# Altium PCB Half-bridge_eval.PcbDoc
Units mm, origin at the board's own origin, x right, y up, seen from the top; angles counter-clockwise.
Board outline 85.72 x 47.24 mm, 2 copper layers (Top Layer, Bottom Layer); 14 components, 10 nets, 43 pads, 0 vias.
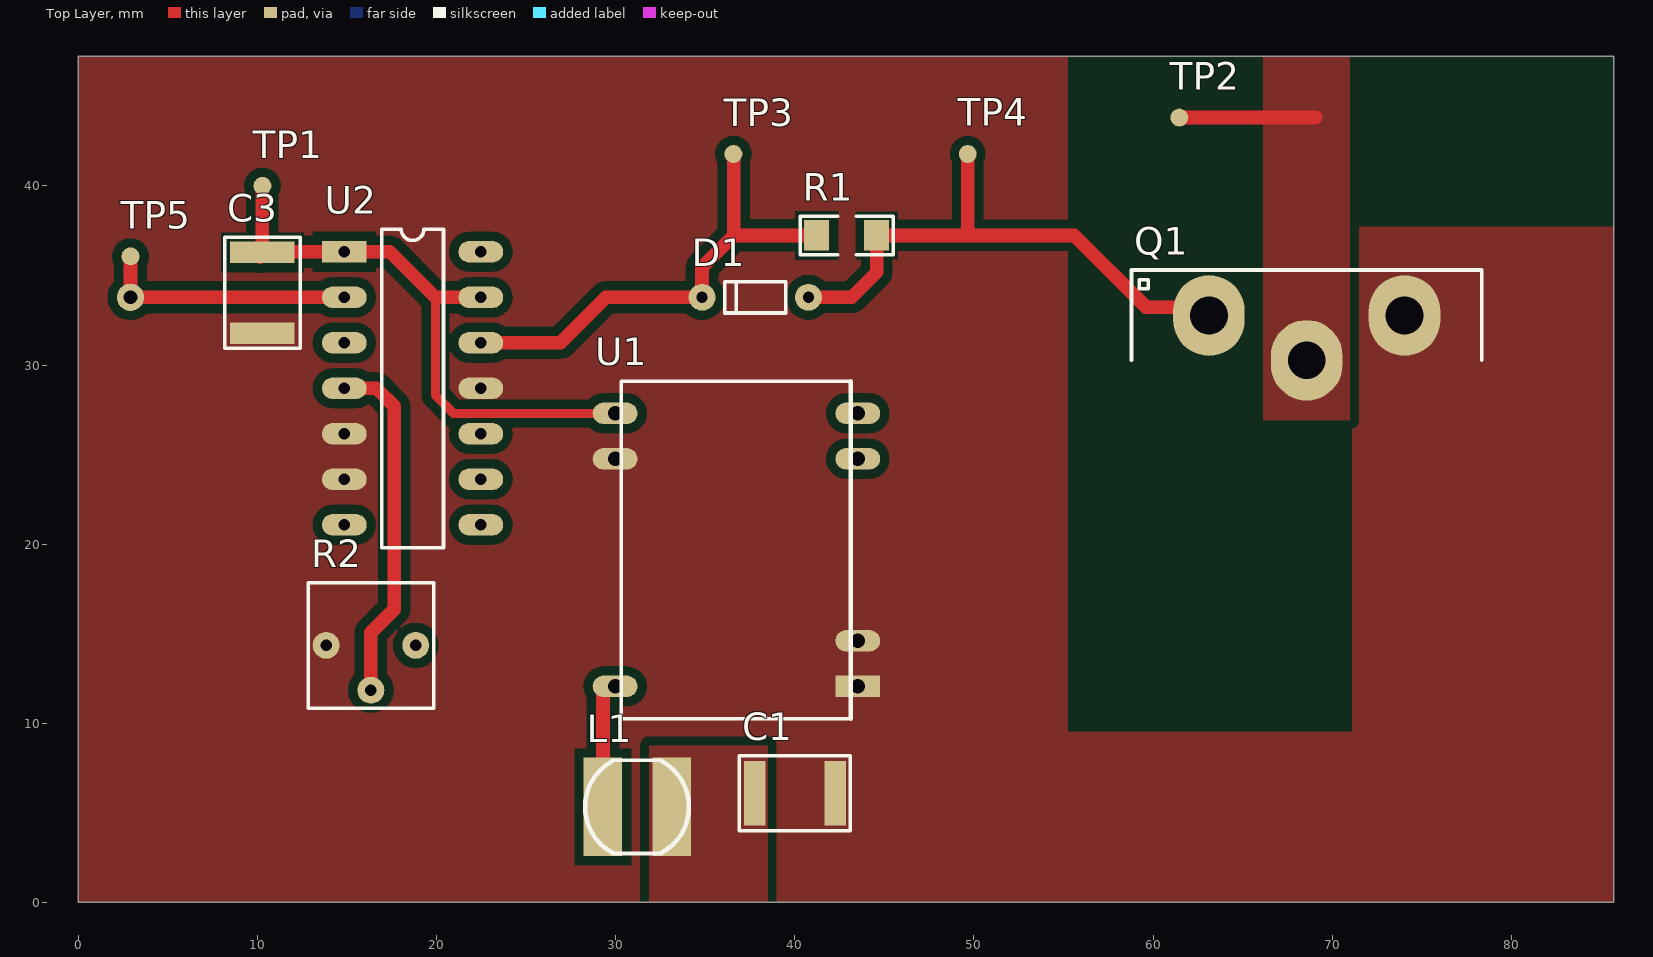
[diagram p0: Top Layer view]
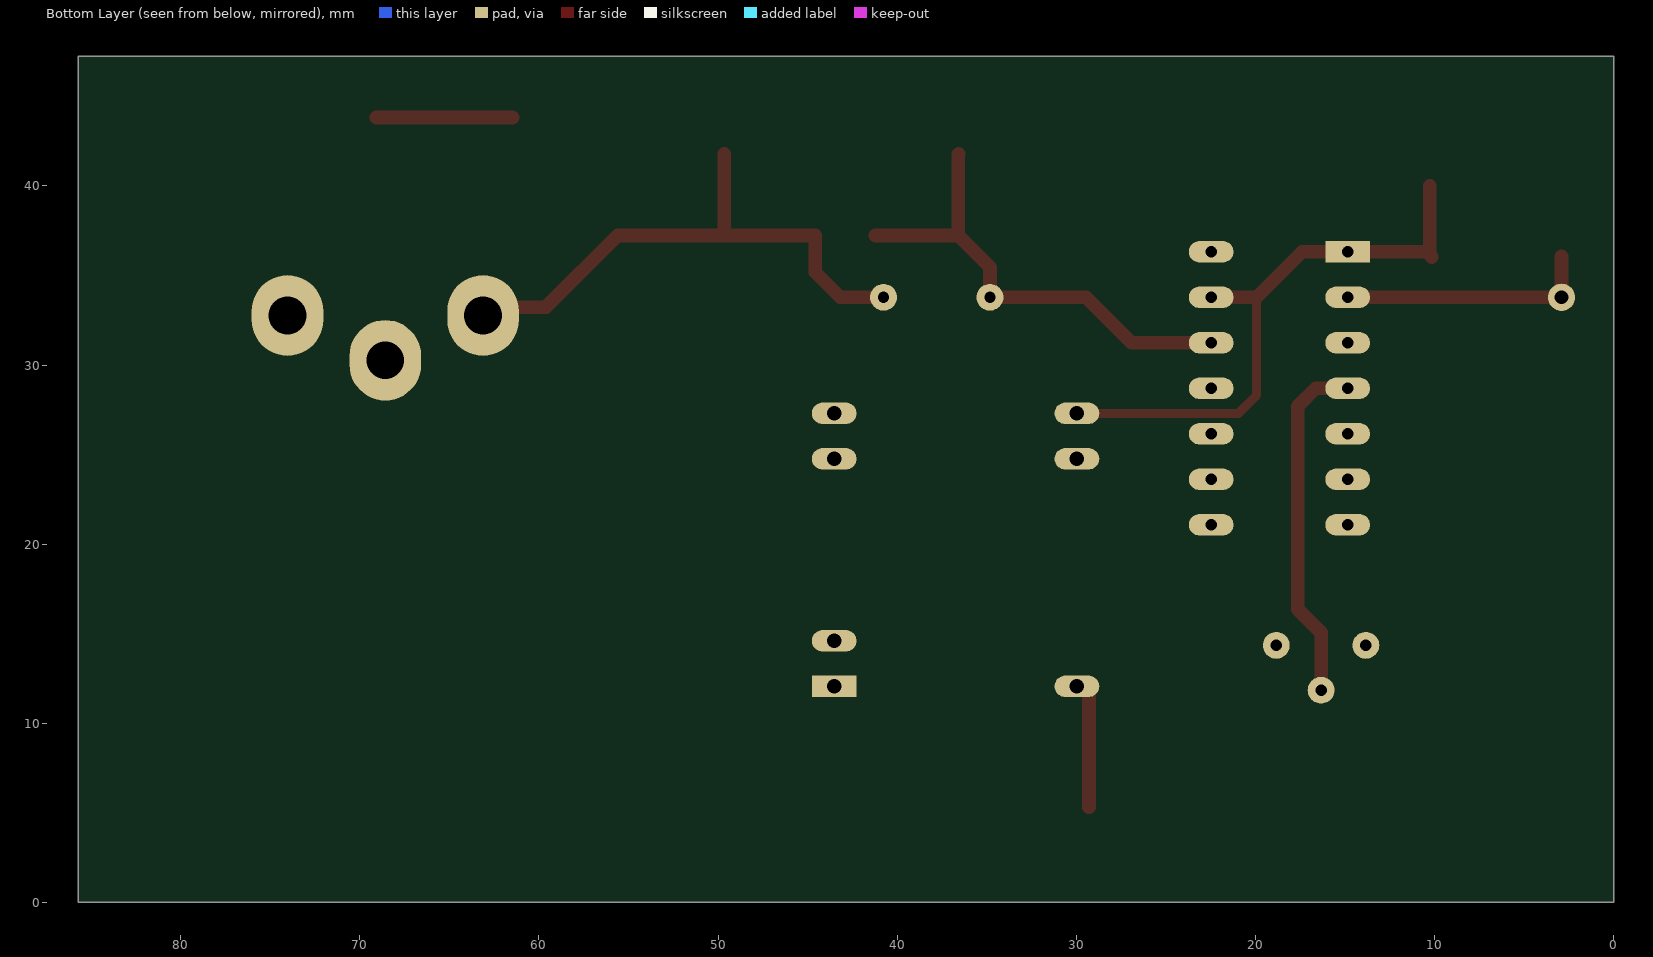
[diagram p1: Bottom Layer view, seen from below]

## Layer stack, top to bottom
Top Solder: solder mask 0.0102, Solder Resist, Dk 3.5
Top Layer: signal copper 0.0356
Dielectric 1: dielectric 0.32, FR-4, Dk 4.8
Bottom Layer: signal copper 0.0356
Bottom Solder: solder mask 0.0102, Solder Resist, Dk 3.5

## Board outline
0,0 85.725,0 85.725,47.244 0,47.244

## Design rules (kind name [scope] priority, off if disabled: settings)
BoardOutlineClearance [All] p1: gap=0.025
Clearance [All] p1: gap=0.508 except(0.254: Track-THPad)
PlaneConnect [All] p1: planeconnectstyle=Direct reliefexpansion=0.508 reliefentries=4 reliefconductorwidth=0.254 reliefairgap=0.254
PolygonConnect [All] p1: connectstyle=Direct reliefconductorwidth=0.254 reliefentries=4 polygonreliefangle="90 Angle" airgapwidth=0.254
RoutingVias [All] p1: holewidth=0.711 width=1.27 viastyle="Through Hole" minholewidth=0.711 minwidth=1.27 maxholewidth=0.711 maxwidth=1.27
SolderMaskExpansion [All] p1: expansion=0.102
Width [All] p1: maxlimit=1.27 minlimit=0.254 preferedwidth=0.762 minimp=50.000000 maximp=50.000000 favimp=50.000000
29 further rules are at their usual default settings.

## Classes and differential pairs
net class HV: GND NetD1_1 NetL1_2

## Components (designator, comment, footprint, x,y, rotation, side; value= is the part's Value field where it differs from the comment)
C1 "Cap" C4532 40.005,6.096 r180 top
C3 "Cap" C4532 10.287,34.036 r90 top
D1 "1N4148" DO-35_02 34.827,32.907 r0 top
L1 "Inductor" TCK-047 28.197,8.134 r270 top
Q1 "IXFK 34N80" "TO-264 AA" 74.039,32.766 r180 top
R1 "1" R_1206 42.926,37.211 r270 top
R2 "Res Adj2" CT-6EP 18.843,14.351 r180 top
TP1 "TP-SM-C-100" TP-SM-C-100 10.287,40.005 r180 top
TP2 "TP-SM-C-100" TP-SM-C-100 61.468,43.815 r90 top
TP3 "TP-SM-C-100" TP-SM-C-100 36.576,41.783 r0 top
TP4 "TP-SM-C-100" TP-SM-C-100 49.657,41.783 r90 top
TP5 "TP-SM-C-100" TP-SM-C-100 2.921,36.068 r270 top
U1 "TDR 3-4812" "PID DC-DC Converter - duplicate" 29.972,27.305 r0 top
U2 "IR21094" DIP14 14.859,36.322 r0 top

## Footprints (in the part's own frame and the unit in brackets; to place one, negate y for a bottom-side part, rotate by r counter-clockwise, add the part's x,y. Pads: shape width x height; smd on the part's side, far side on the other; paste and mask are expansions set on the pad)
C4532 [mm]
  rect 1.2x3.6 smd: 1(-2.25,0) 2(2.25,0)
  silkscreen extent -3.1,-2.1 3.1,2.1
CT-6EP [mm] "pot"
  round 1.5 hole 0.635: 1(5,0) 2(2.5,2.5) 3(0,0)
  silkscreen extent -1,-3.5 6,3.5
DIP14 [mm]
  rect 2.5x1.2 hole 0.635: 1(0,0)
  oval 2.5x1.2 hole 0.635: 2(0,-2.54) 3(0,-5.08) 4(0,-7.62) 5(0,-10.16) 6(0,-12.7) 7(0,-15.24) 8(7.62,-15.24) 9(7.62,-12.7) 10(7.62,-10.16) 11(7.62,-7.62) 12(7.62,-5.08) 13(7.62,-2.54) 14(7.62,0)
  silkscreen extent 2.08,-16.51 5.54,1.27
DO-35_02 [mm]
  round 1.5 hole 0.635: 1(0,0.875) 2(5.94,0.875)
  silkscreen extent 1.27,0 4.67,1.75
"PID DC-DC Converter - duplicate" [mm]
  rect 2.5x1.2 hole 0.813: 1(13.55,-15.24)
  oval 2.5x1.2 hole 0.813: 2(13.55,-12.7) 6(13.55,-2.54) 7(13.55,0) 8(0,0) 9(0,-2.54) 14(0,-15.24)
  silkscreen extent 0.35,-17.04 13.15,1.8
R_1206 [mm]
  rect 1.7x1.4 smd: 1(-0.025,-1.7) 2(-0.025,1.65)
  silkscreen extent -1.1,-2.63 1.05,2.58, body extent -0.81,-1.68 0.8,1.68, height 1.1
TCK-047 [mm]
  rect 5.5x2.15 smd: 1(2.8,4.95) 2(2.8,1.1)
  silkscreen extent 0.2,0.1 5.4,5.9
"TO-264 AA" [mm] "Power Mosfet"
  oval 4x4.5 hole 2.108: 1(10.92,0) 2(5.46,2.5) 3(0,0)
  silkscreen extent -4.32,-2.54 15.24,2.5
TP-SM-C-100 [mm] "Test Point, Surface Mounting, Circular, Pad Diameter 1mm"
  round 1 smd: 1(0,0)

## Part data
C1 C3: "Capacitor"
D1: "Diode"
Q1: "MOSFET 34A"
R1: library part RES_SMD1, "RES SMD 1% 1/4W 1206"
R2: "Variable Resistor"
TP1 TP2 TP3 TP4 TP5: library part CMP-0484-00002-2, "Test Point, Surface Mount, Circular, Pad Diameter 1 mm"
U1: "48V-12V Converter"
U2: "HALF-BRIDGE DRIVER"

## Free pads (board coordinates)
  round 1.524 hole 0.762: 2(2.921,33.782)

## Nets (pads, with @x,y where several pads share a name; then routed paths per layer and width w, separated by ;. In a path a pad name is that pad's centre, name@x,y a point inside that pad or via, vN(x,y) a via of type N, cw(c..) or ccw(c..) an arc to the next point about the centre after c; other vN are vias at no path point)
12V: C3.2 TP1.1 U1.8 U2.1 U2.13 | length 33.3
  Top Layer w0.508: 19.939,33.782 19.939,28.321 20.955,27.305 U1.8
  Top Layer w0.762: C3.2@10.16,36.032 C3.2@10.45,36.322 ; C3.2 10.323,36.322 C3.2@10.45,36.322 ; TP1.1 10.287,36.485 C3.2@10.45,36.322 ; U2.13 19.939,33.782 17.399,36.322 U2.1 C3.2@10.45,36.322
48V: C1.2 L1.1
GND: C1.1 C3.1 Q1.3 R2.1 U1.1 U1.2 U1.9 U2.5 U2.6 U2.11
HIGH-SIDE: Q1.2 TP2.1 | length 7.6
  Top Layer w0.762: TP2.1 69.088,43.815
NetD1_1: D1.1 R1.1 TP3.1 U2.12 | length 26.8
  Top Layer w0.762: U2.12 26.924,31.242 29.464,33.782 D1.1 34.827,35.462 36.601,37.236 ; TP3.1 36.601,41.758 36.601,37.236 ; R1.1 36.601,37.236
NetD1_2: D1.2 Q1.1 R1.2 TP4.1 | length 31.2
  Top Layer w0.762: D1.2 43.18,33.782 44.576,35.178 R1.2 49.657,37.236 ; TP4.1 49.657,37.236 ; Q1.1@63.119,33.234 59.603,33.234 55.601,37.236 49.657,37.236
NetL1_2: L1.2 U1.14 | length 6.6
  Top Layer w0.762: L1.2 U1.14@29.297,11.938
NetR2_2: R2.2 U2.4 | length 19.6
  Top Layer w0.762: U2.4 16.637,28.702 17.653,27.686 17.653,16.383 16.343,15.073 R2.2
NetTP5_1: pad.2 TP5.1 U2.2 | length 14.2
  Top Layer w0.762: TP5.1 pad.2 U2.2
SD: U2.3
pads on no net: R2.3 U1.6 U1.7 U2.7 U2.8 U2.9 U2.10 U2.14

## Polygon pours and split planes (outlines as drawn)
GND on Top Layer "gnd_low_current" (solid, remove dead copper, pour order 5): -2.413,61.849 55.245,61.849 55.245,26.67 55.245,9.525 109.982,9.525 109.982,-11.049 41.275,-11.049 -10.033,-11.049 -10.033,61.849
GND on Top Layer "gnd_High_current" (solid, remove dead copper, pour order 3): 76.073,37.719 97.282,37.719 97.282,-10.414 71.12,-10.414 71.12,37.719
HIGH-SIDE on Top Layer "HIGH_SIDE" (solid, remove dead copper, pour order 1): 66.167,26.924 66.167,55.88 71.12,55.88 70.993,55.88 70.993,26.924
48V on Top Layer "48V" (solid, remove dead copper, pour order 0): 31.877,8.763 31.877,-8.128 37.465,-8.128 38.481,-8.128 38.481,8.763

## Silkscreen, mask and mechanical layers (free items; w line width, h text height)
Mechanical 1:
  the board outline again, w0.254